# Altium PCB DVT-PowerAMP-Stage.PcbDoc
Units mm, origin at the board's own origin, x right, y up, seen from the top; angles counter-clockwise.
Board outline 95 x 95 mm, 2 copper layers (Top Layer, Bottom Layer); 27 components, 13 nets, 63 pads, 2 vias.
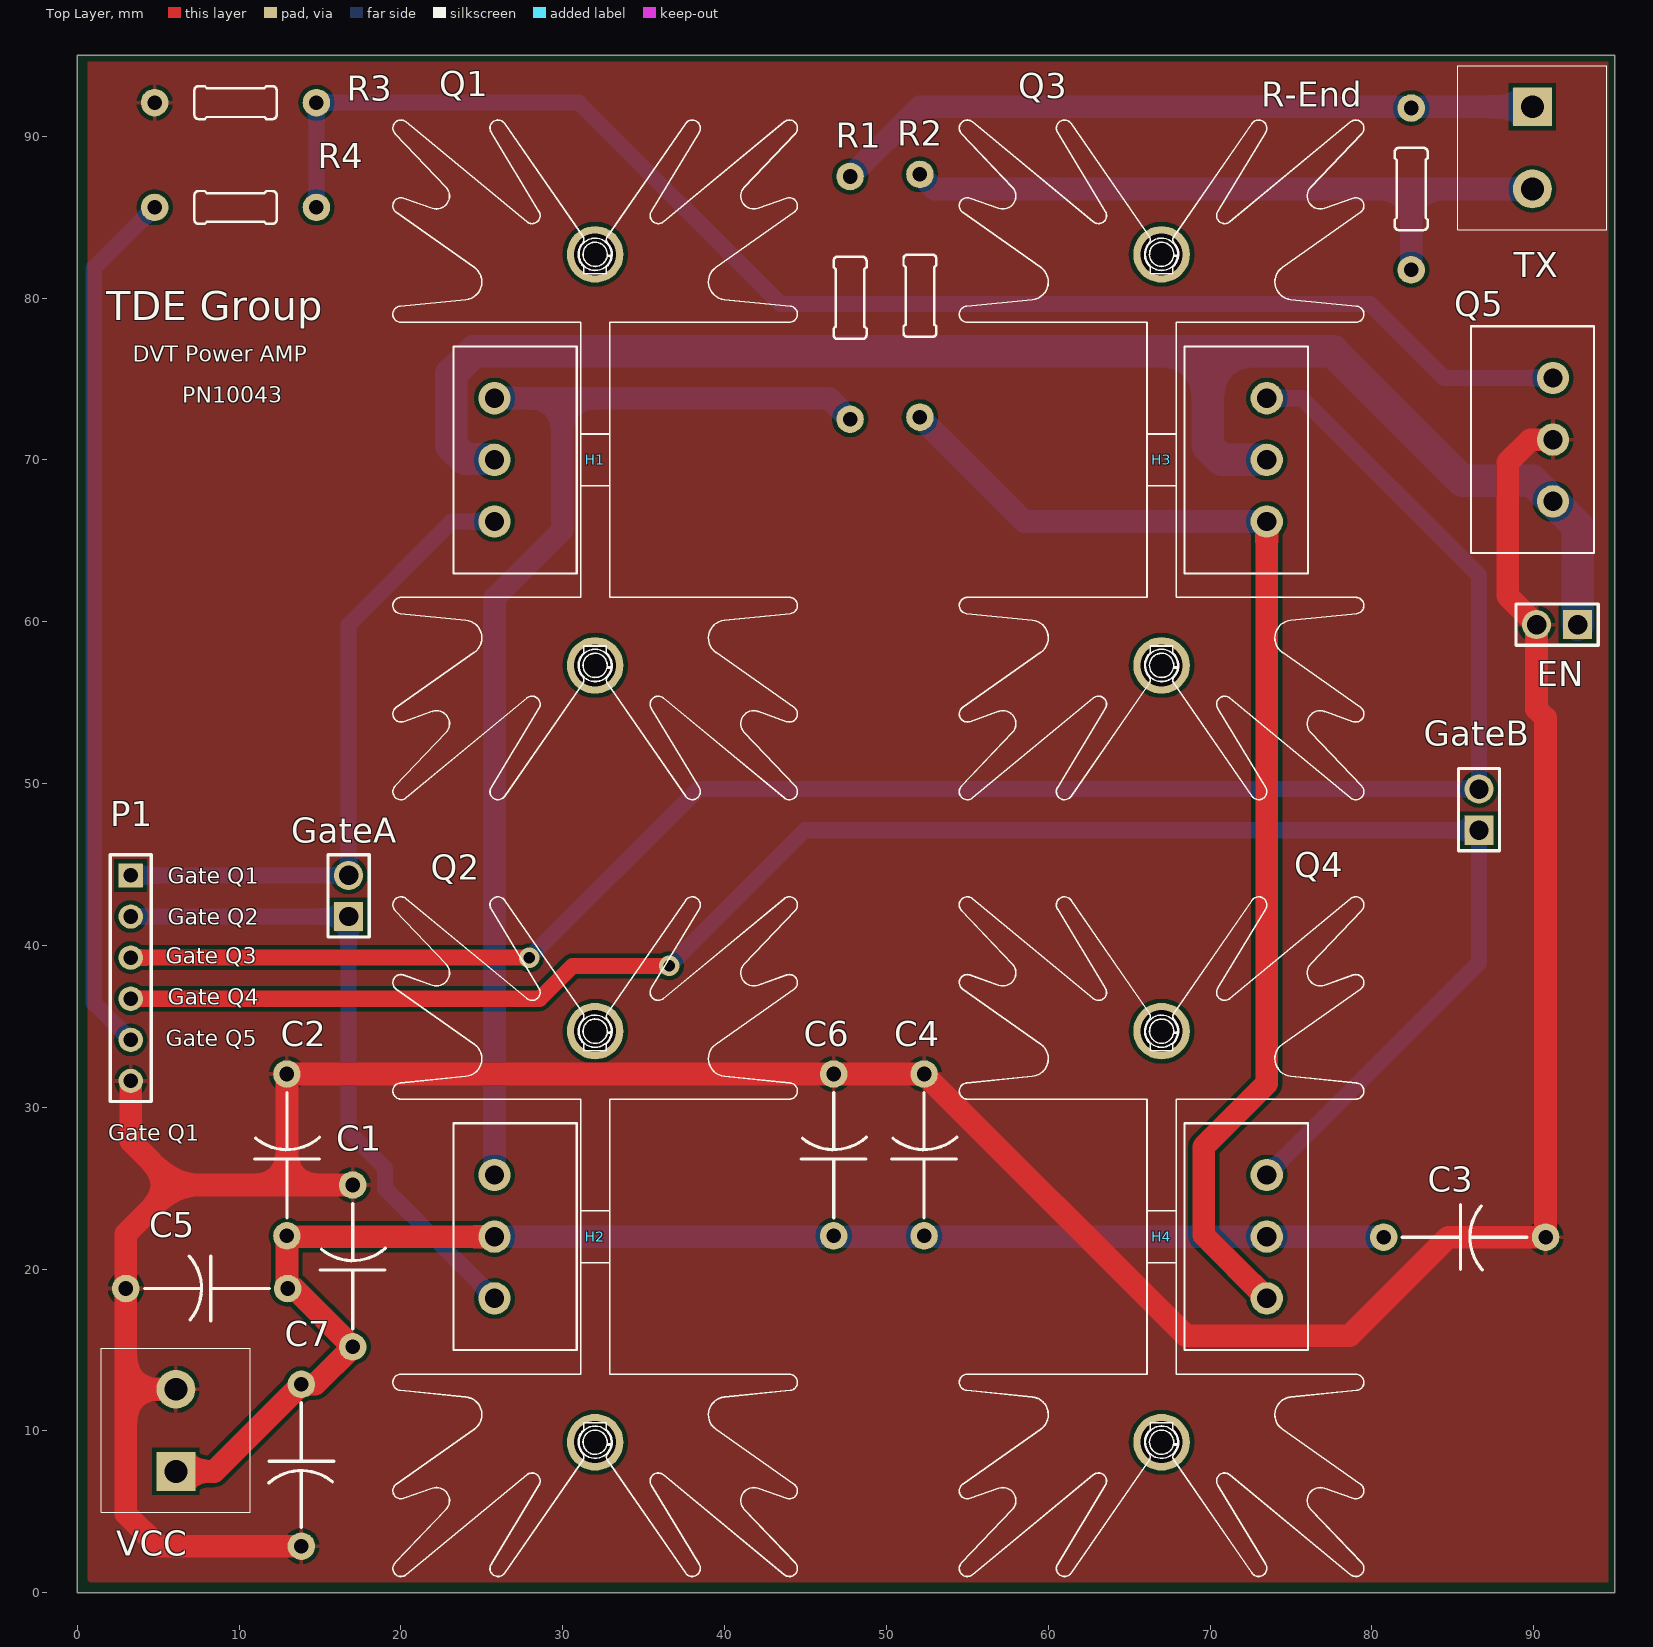
[diagram p0: Top Layer view]
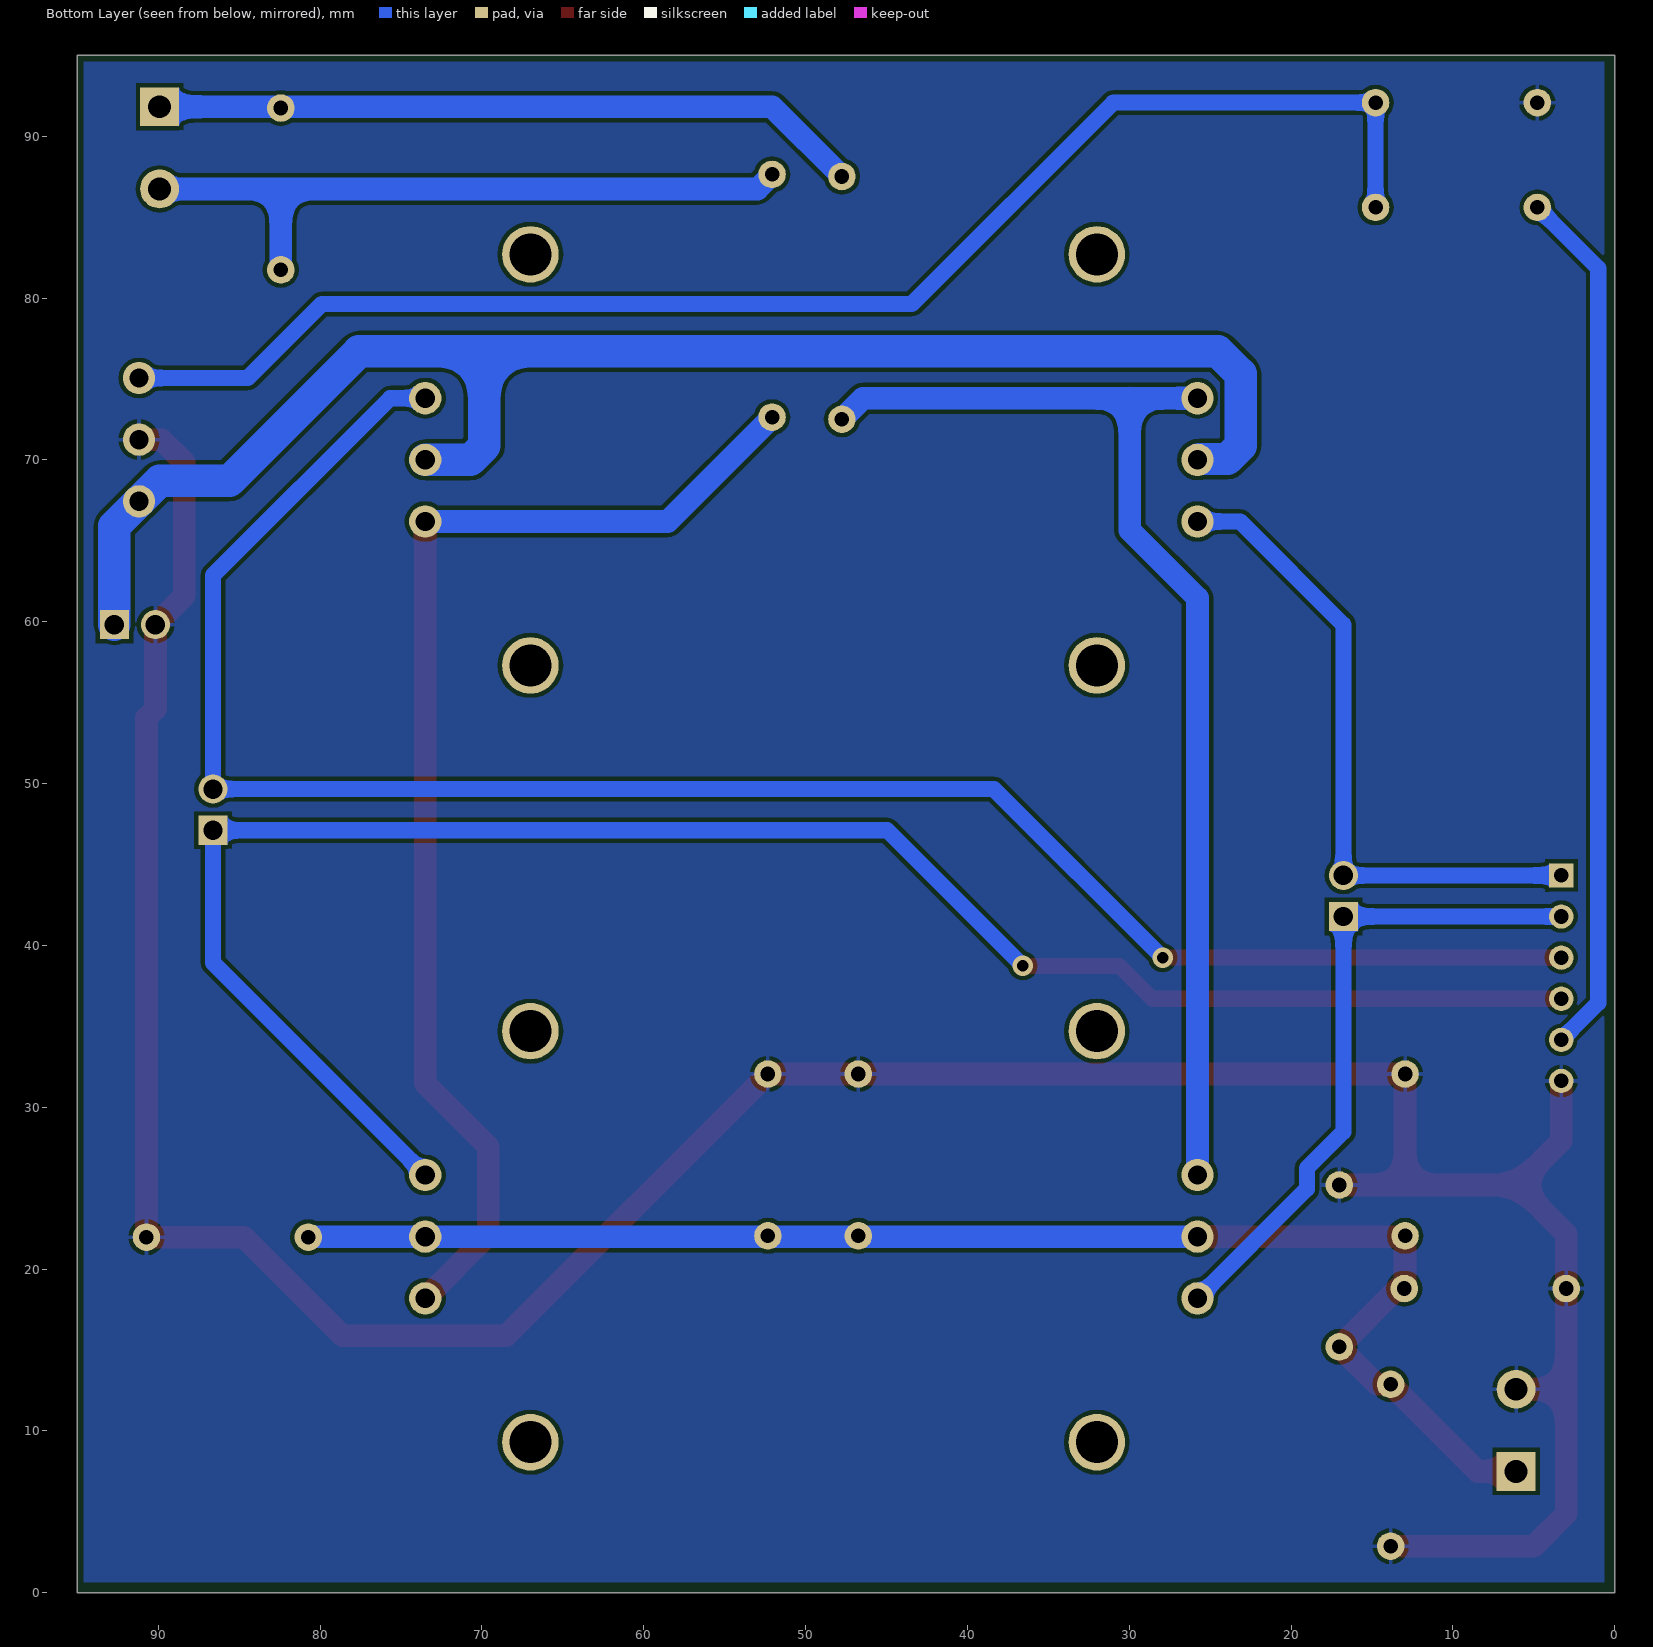
[diagram p1: Bottom Layer view, seen from below]

## Layer stack, top to bottom
Top Solder: solder mask 0.0102, Solder Resist, Dk 3.5
Top Layer: signal copper 0.0356
Dielectric 1: dielectric 0.32, FR-4, Dk 4.8
Bottom Layer: signal copper 0.0356
Bottom Solder: solder mask 0.0102, Solder Resist, Dk 3.5

## Board outline
0,0 0,95 95,95 95,0

## Design rules (kind name [scope] priority, off if disabled: settings)
Clearance Polygon [InNamedPolygon('GND')] p1: gap=0.254
Clearance [All] p2: gap=0.12
ComponentClearance [All] p1: gap=0.1 collisioncheckmode=3 verticalgap=0.1 showdistances=FALSE
Height [All] p1: minheight=0 maxheight=50 prefheight=12.7
HoleSize [All] p1: absolutevalues=TRUE maxlimit=4 minlimit=0.025 maxpercent=80.000 minpercent=20.000
PolygonConnect [All] p1: connectstyle=Relief reliefconductorwidth=0.254 reliefentries=4 polygonreliefangle="90 Angle" airgapwidth=0.254
RoomDefinition DVT-PowerAMP-Stage [InComponentClass('DVT-PowerAMP-Stage')] p1: confinementstyle=ConfineIn formatcopy=TRUE lockcomponents=FALSE outline -4.699,-4.572 106.553,-4.572 106.553,104.902 -4.699,104.902
RoutingVias [All] p1: holewidth=0.35 width=0.5 viastyle="Through Hole" minholewidth=0.3 minwidth=0.4 maxholewidth=0.711 maxwidth=1.27
SilkToSilkClearance [All] p1: silktosilkclearance=0.1
SolderMaskExpansion [All] p1: expansion=0.102
Width [All] p1: maxlimit=4 minlimit=0.254 preferedwidth=0.8
26 further rules are at their usual default settings.

## Components (designator, comment, footprint, x,y, rotation, side; value= is the part's Value field where it differs from the comment)
C1 "Capacitor-Dummy-THT" Dummy-10mm 17.018,20.193 r90 top
C2 "Capacitor-Dummy-THT" Dummy-10mm 12.954,27.051 r90 top
C3 "Capacitor-Dummy-THT" Dummy-10mm 85.725,21.971 r0 top
C4 "Capacitor-Dummy-THT" Dummy-10mm 52.324,27.051 r90 top
C5 "Capacitor-Dummy-THT" Dummy-10mm 8.001,18.796 r180 top
C6 "Capacitor-Dummy-THT" Dummy-10mm 46.736,27.051 r90 top
C7 "Capacitor-Dummy-THT" Dummy-10mm 13.843,7.874 r270 top
EN "PHOENIX_1715721" HDR1X2 91.44,59.817 r180 top
GateA "Plug_2_90_2.54" HDR1X2 16.764,43.053 r90 top
GateB "Plug_2_90_2.54" HDR1X2 86.614,48.387 r90 top
H1 "SK129-25,4-STS-220" SK129-25,4-STS-220 32,70 r90 top
H2 "SK129-25,4-STS-220" SK129-25,4-STS-220 32,22 r90 top
H3 "SK129-25,4-STS-220" SK129-25,4-STS-220 67,70 r90 top
H4 "SK129-25,4-STS-220" SK129-25,4-STS-220 67,22 r90 top
P1 "Plug_06_2.54" HDR1X6_2.54 3.302,37.973 r270 top
Q1 "CHT-NMOS4010-TO254-T" TO254 25.781,70 r270 top
Q2 "CHT-PMOS3008-TO254-T" TO254 25.781,22 r270 top
Q3 "CHT-NMOS4010-TO254-T" TO254 73.5,70 r90 top
Q4 "CHT-PMOS3008-TO254-T" TO254 73.5,22 r90 top
Q5 "CHT-NMOS4010-TO254-T" TO254 91.186,71.247 r90 top
R1 "Resistor-Dummy-THT" Dummy-15mm 47.752,80.01 r90 top
R2 "Resistor-Dummy-THT" Dummy-15mm 52.07,80.137 r90 top
R3 "Resistor-Dummy-THT" Dummy-10mm 9.779,92.075 r0 top
R4 "Resistor-Dummy-THT" Dummy-10mm 9.779,85.598 r180 top
R-End "Resistor-Dummy-THT" Dummy-10mm 82.423,86.741 r90 top
TX "PHOENIX_1715721" Phoenix-2-5_08 89.916,89.281 r270 top
VCC "PHOENIX_1715721" Phoenix-2-5_08 6.096,10.033 r90 top

## Footprints (in the part's own frame and the unit in brackets; to place one, negate y for a bottom-side part, rotate by r counter-clockwise, add the part's x,y. Pads: shape width x height; smd on the part's side, far side on the other; paste and mask are expansions set on the pad)
Dummy-10mm [mm] "Dummy-10mm"
  round 1.7 hole 0.9: 1(-5,0) 2(5,0)
  silkscreen extent -3.88,-2.01 3.85,2, body extent -2.39,-0.88 2.41,0.88, height 1.87
Dummy-15mm [mm] "Dummy-15mm"
  round 1.7 hole 0.9: 1(-7.5,0) 2(7.5,0)
  silkscreen extent -2.54,-1.02 2.54,1.02, body extent -2.39,-0.88 2.41,0.88, height 1.87
HDR1X2 [mm] "Connector; Header; 2 Position"
  rect 1.8x1.8 hole 1.2: 1(-1.27,0)
  round 1.8 hole 1.2: 2(1.27,0)
  silkscreen extent -2.54,-1.27 2.54,1.27, body extent -2.54,-1.27 2.54,1.27, height 8.62
HDR1X6_2.54 [mm] "Connector; Header; 6 Position"
  rect 1.5x1.5 hole 0.9: 1(-6.35,0)
  round 1.5 hole 0.9: 2(-3.81,0) 3(-1.27,0) 4(1.27,0) 5(3.81,0) 6(6.35,0)
  silkscreen extent -7.62,-1.27 7.62,1.27, body extent -7.61,-1.27 7.63,1.27, height 8.62
Phoenix-2-5_08 [mm] "Phoenix, 1715721"
  rect 2.4x2.4 hole 1.4: 1(-2.54,0)
  round 2.4 hole 1.4: 2(2.54,0)
  silkscreen extent -5.06,-4.6 5.06,4.6, body extent -5.05,-5.19 5.85,4.61, height 14.2
SK129-25,4-STS-220 [mm] "SK129-25,4-STS-220"
  round 3.5 hole 2.6: 1(-12.7,0) 2(12.7,0)
  silkscreen extent -21,-12.5 21,12.5, body extent -21,-12.6 21,12.4, height 25.6
TO254 [mm] "TO254"
  round 2 hole 1.2: Drain(-3.81,0) Gate(3.81,0) Source(0,0)
  silkscreen extent -7.01,-2.54 7.01,5.08, body extent -6.87,-1.51 6.87,5.08, height 25

## Part data
EN: library part Plug_2_90_2.54, "Plug, 2-Pin"
GateA GateB: "Plug, 2-Pin"
H1 H2 H3 H4: "Heatsink, 6.5K/W, TO220"
P1: "Plug, 08-Pin"
Q1 Q3 Q5: "N-FET, 40V@ 10A, Saturn series"
Q2 Q4: "P-FET, 30V@ 8A, Venus series"
TX VCC: library part 2Pol_1715721, "Phoenix, 2 pol, 5.08mm, 22A, 715721"

## Via types
v1: diameter 1.27, hole 0.711, Top Layer to Bottom Layer, 2 vias

## Nets (pads, with @x,y where several pads share a name; then routed paths per layer and width w, separated by ;. In a path a pad name is that pad's centre, name@x,y a point inside that pad or via, vN(x,y) a via of type N, cw(c..) or ccw(c..) an arc to the next point about the centre after c; other vN are vias at no path point)
GND: C1.2 C2.2 C3.2 C4.2 C5.2 C6.2 C7.2 EN.2 P1.6 Q5.Source R3.1 VCC.2 | length 201
  Top Layer w1.4: P1.6 3.302,27.907 6.016,25.193 ; VCC.2 3.001,12.573 ; C7.2 5,2.874 3.001,4.873 3.001,12.573 ; C1.2 12.954,25.193 ; Q5.Source 89.789,71.247 88.392,69.85 88.392,61.595 EN.2 90.17,54.61 90.725,54.055 C3.2 84.709,21.971 78.613,15.875 68.5,15.875 C4.2 C6.2 C2.2 12.954,25.193 ; 3.001,12.573 C5.2 3.001,22.178 6.016,25.193 ; 6.016,25.193 12.954,25.193
NetEN_1: EN.1 Q1.Source Q3.Source Q5.Drain | length 97.9
  Bottom Layer w2: Q1.Source@25.682,70.055 23.925,70.055 23.114,70.866 23.114,75.311 24.511,76.708 77.597,76.708 85.598,68.707 89.916,68.707 92.71,65.913 EN.1 ; 69.85,76.708 69.85,70.866 70.716,70 Q3.Source
NetGateA_1: GateA.1 P1.2 Q2.Gate | length 40.8
  Bottom Layer w1: P1.2 GateA.1 16.764,28.477 19.018,26.223 19.018,24.953 Q2.Gate
NetGateA_2: GateA.2 P1.1 Q1.Gate | length 40.6
  Bottom Layer w1: P1.1 GateA.2 16.764,59.817 23.137,66.19 Q1.Gate
NetGateB_1: GateB.1 P1.4 Q4.Gate | length 114.4
  Top Layer w1: P1.4 28.575,36.703 30.607,38.735 v1(36.576,38.735)
  Bottom Layer w1: v1(36.576,38.735) 44.958,47.117 GateB.1 86.614,38.924 Q4.Gate
NetGateB_2: GateB.2 P1.3 Q3.Gate | length 118.5
  Top Layer w1: P1.3 v1(27.94,39.243)
  Bottom Layer w1: v1(27.94,39.243) 38.354,49.657 GateB.2 86.614,62.865 75.669,73.81 Q3.Gate
NetP1_5: P1.5 R4.2 | length 53.9
  Bottom Layer w1: P1.5 1.016,36.449 1.016,81.835 R4.2
NetQ1_Drain: Q1.Drain Q2.Drain R1.1 | length 72.2
  Bottom Layer w1.4: Q2.Drain 25.781,61.468 29.972,65.659 29.972,73.81 ; Q1.Drain 29.972,73.81 ; R1.1@47.722,72.54 46.452,73.81 29.972,73.81
NetQ3_Drain: Q3.Drain Q4.Drain R2.1 | length 75.3
  Top Layer w1.4: Q4.Drain 69.596,22.094 69.596,27.559 73.5,31.463 Q3.Drain
  Bottom Layer w1.4: R2.1 58.517,66.19 Q3.Drain
NetQ5_Gate: Q5.Gate R3.2 R4.1 | length 89.9
  Bottom Layer w1: R4.1 R3.2 30.988,92.075 43.434,79.629 79.89,79.629 84.462,75.057 Q5.Gate
NetR1_2: R1.2 R-End.2 TX.1 | length 43.9
  Bottom Layer w1.4: R1.2 52.063,91.821 TX.1
NetR2_2: R2.2 R-End.1 TX.2 | length 43.2
  Bottom Layer w1.4: R2.2 52.966,86.741 82.423,86.741 ; R-End.1 82.423,86.741 ; TX.2 82.423,86.741
VCC: C1.1 C2.1 C3.1 C4.1 C5.1 C6.1 C7.1 Q2.Source Q4.Source VCC.1 | length 90.6
  Top Layer w1.4: VCC.1 8.462,7.493 C7.1 14.699,12.874 C1.1 13.415,18.796 C5.1 ; C5.1@12.954,18.843 C2.1@12.954,22 ; C2.1 C2.1@12.954,22 ; Q2.Source C2.1@12.954,22
  Bottom Layer w1.4: Q2.Source Q4.Source C3.1@80.725,22
pads on no net: H1.1 H1.2 H2.1 H2.2 H3.1 H3.2 H4.1 H4.2

## Polygon pours and split planes (outlines as drawn)
GND on Top Layer "GND" (solid, pour order 0): 0.635,94.615 94.615,94.615 94.615,0.635 0.762,0.635 0.635,0.762
GND on Bottom Layer "GND" (solid, pour order 2): 0.635,0.635 0.635,94.615 94.615,94.615 94.615,0.635

## Silkscreen, mask and mechanical layers (free items; w line width, h text height)
Top Overlay:
  text "TDE Group" at 1.778,78.613 h1.8
  text "DVT Power AMP" at 3.429,76.073 h1
  text "PN10043" at 6.477,73.533 h1
  text "Gate Q1" at 5.588,43.815 h1
  text "Gate Q2" at 5.588,41.275 h1
  text "Gate Q3" at 5.461,38.862 h1
  text "Gate Q4" at 5.588,36.322 h1
  text "Gate Q5" at 5.461,33.782 h1
  text "Gate Q1" at 1.905,27.94 h1
Outline:
  the board outline again, w0.3

## Dimensions
95,0 to 95,95 on Mechanical 16
95,95 to 0,95 on Mechanical 16